# EAGLE board Discharge Board (EAGLE 8.0.1)
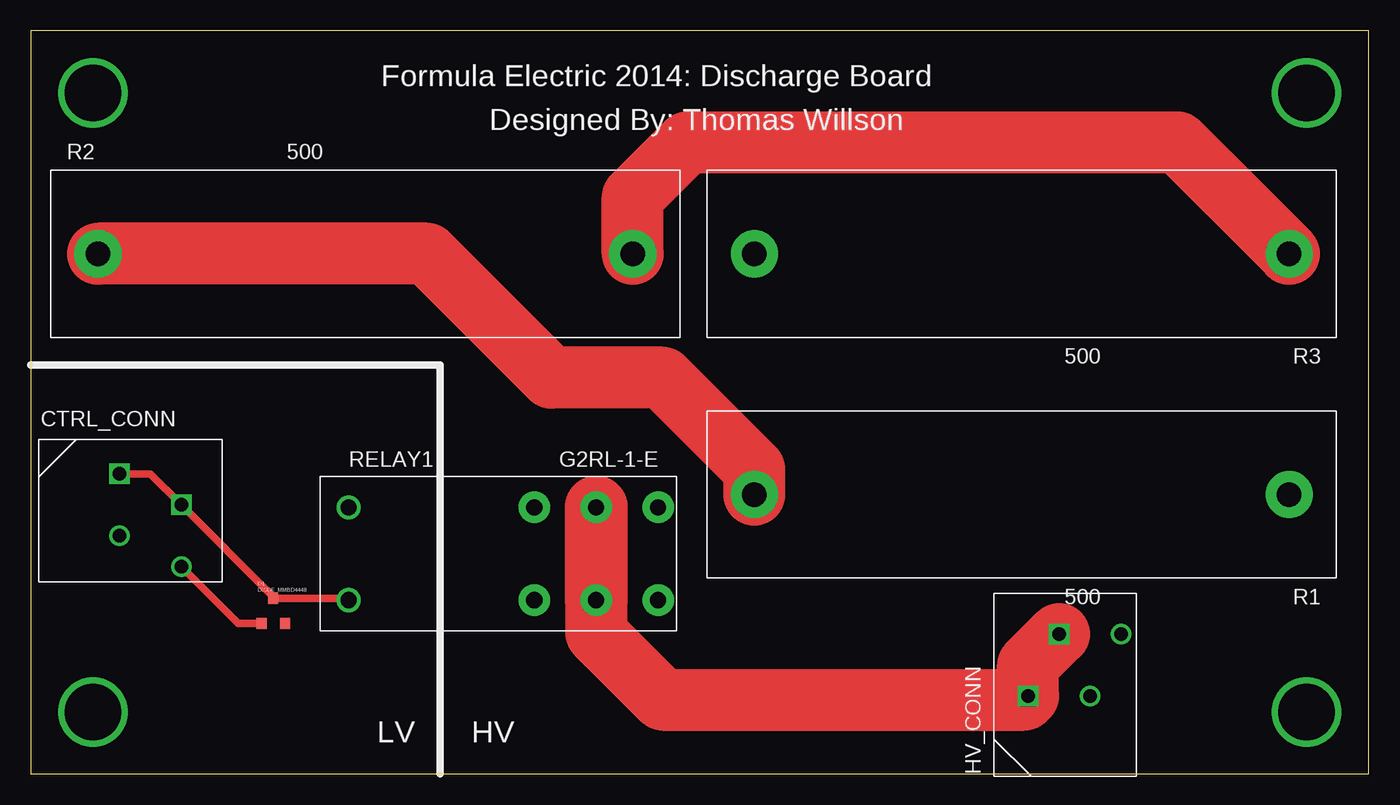
[diagram p0: board, top side]
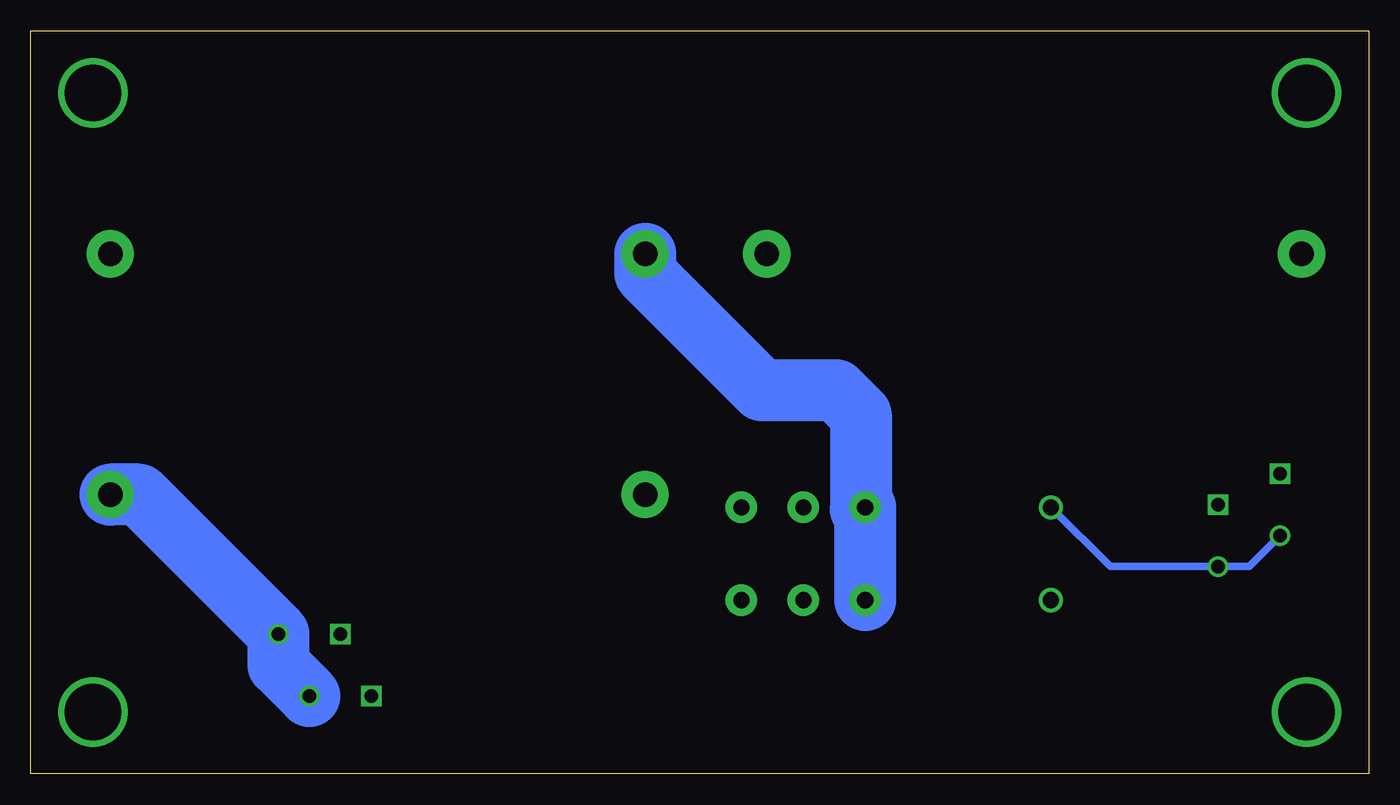
[diagram p1: board, bottom side, seen from below]

Size 108 x 60 mm. Coordinates in mm from the lower left corner, seen from the top.
Outline: 0,0 108,0 108,60 0,60 0,0
Copper layers (1*16): Top 0.035mm / dielectric 1.5mm / Bottom 0.035mm
Design rules "default": minimum track width 10mil, minimum drill 24mil, track to track 8mil, track to pad 8mil, pad to pad 8mil, via to via 8mil, smd to smd 8mil, copper to edge 40mil, drill to drill 8mil, minimum pad ring 10mil, minimum via ring 8mil, stop-mask expansion 4mil, vias tented up to drill 0mil, thermal gap 10mil

## Footprints (pad centres in the part's own frame; a part is rotated, then mirrored left to right if it is on the bottom)
CONNECTOR_2 = drill 1.1 square: 1 0,0; 2 2.5,5 | drill 1.1: 3 5,0; 4 7.5,5
SOT-23-3 = smd 0.8 x 0.9: P$1 0,1; P$2 -0.95,-1; P$3 0.95,-1
VISHAY_FS20W_RES = drill 1.981 pad 3.81: P$1 -21.59,0; P$2 21.59,0
G2RL-1-E_RELAY = drill 1.3: P$1 -15,-3.75; P$8 -15,3.75 | drill 1.3 pad 2.54: P$2 0,-3.75; P$3 5,-3.75; P$4 10,-3.75; P$5 10,3.75; P$6 5,3.75; P$7 0,3.75

## Placement (x,y rotation side)
CTRL_CONN  CONN_2  [CONNECTOR_2]  7.14,24.24 270 top
D1  DIODE_MMBD4448  [SOT-23-3]  19.57,13.16 0 top
HV_CONN  CONN_2  [CONNECTOR_2]  80.51,6.29 0 top
R1  500  [VISHAY_FS20W_RES]  80,22.56 180 top
R2  500  [VISHAY_FS20W_RES]  27,42 0 top
R3  500  [VISHAY_FS20W_RES]  80,42 180 top
RELAY1  G2RL-1-E  [G2RL-1-E_RELAY]  40.64,17.78 0 top

## Library data of the parts
CTRL_CONN D1 HV_CONN R1-R3 = formula electric
RELAY1 = formula electric; COIL: DC 12

## Nets
GND: CTRL_CONN.3 CTRL_CONN.4 D1.P$2 RELAY1.P$8
N$3: R3.P$2 RELAY1.P$2 RELAY1.P$7
N$4: HV_CONN.1 HV_CONN.2 RELAY1.P$3 RELAY1.P$6
N$5: HV_CONN.3 HV_CONN.4 R1.P$1
N$10: R1.P$2 R2.P$1
N$11: R2.P$2 R3.P$1
TSMS_IN: CTRL_CONN.1 CTRL_CONN.2 D1.P$1 RELAY1.P$1

## Tracks (layer width: path | path; a pad name or v marks a point on that pad's centre or on a via)
GND
  Top 0.61: CTRL_CONN.4 16.72,12.16 D1.P$2
  Bottom 0.61: CTRL_CONN.3 9.64,16.74 CTRL_CONN.4 20.85,16.74 RELAY1.P$8
N$3
  Bottom 5: RELAY1.P$2 40.64,21 | 40.64,21 RELAY1.P$7 | R3.P$2 58.41,40.41 49,31 43,31 41,29 41,21.36 40.64,21
N$4
  Top 5: RELAY1.P$3 45.64,11.36 51,6 80.22,6 HV_CONN.1 80.51,8.79 HV_CONN.2
  Top 5.08: RELAY1.P$6 RELAY1.P$3
N$5
  Bottom 5: HV_CONN.3 88.01,8.79 HV_CONN.4 99.28,22.56 R1.P$1
N$6  (via drill 4.57)
  other vias: 5,55
N$7  (via drill 4.57)
  other vias: 5,5
N$8  (via drill 4.57)
  other vias: 103,55
N$9  (via drill 4.57)
  other vias: 103,5
N$10
  Top 5: R1.P$2 58.41,24.59 51,32 42,32 32,42 R2.P$1
N$11
  Top 5: R2.P$2 48.59,46.59 53,51 92.59,51 R3.P$1
TSMS_IN
  Top 0.61: CTRL_CONN.1 9.64,24.24 CTRL_CONN.2 19.57,14.31 D1.P$1 25.51,14.16 RELAY1.P$1

## Text on the board
tPlace: Formula Electric 2014: Discharge Board | LV | HV
tNames: Designed By: Thomas Willson